# Altium PCB PCB2.PcbDoc
Units mil, origin at the board's own origin, x right, y up, seen from the top; angles counter-clockwise.
Board outline 4235.03 x 3180.03 mil, 2 copper layers (Top Layer, Bottom Layer); 12 components, 17 nets, 64 pads, 0 vias.
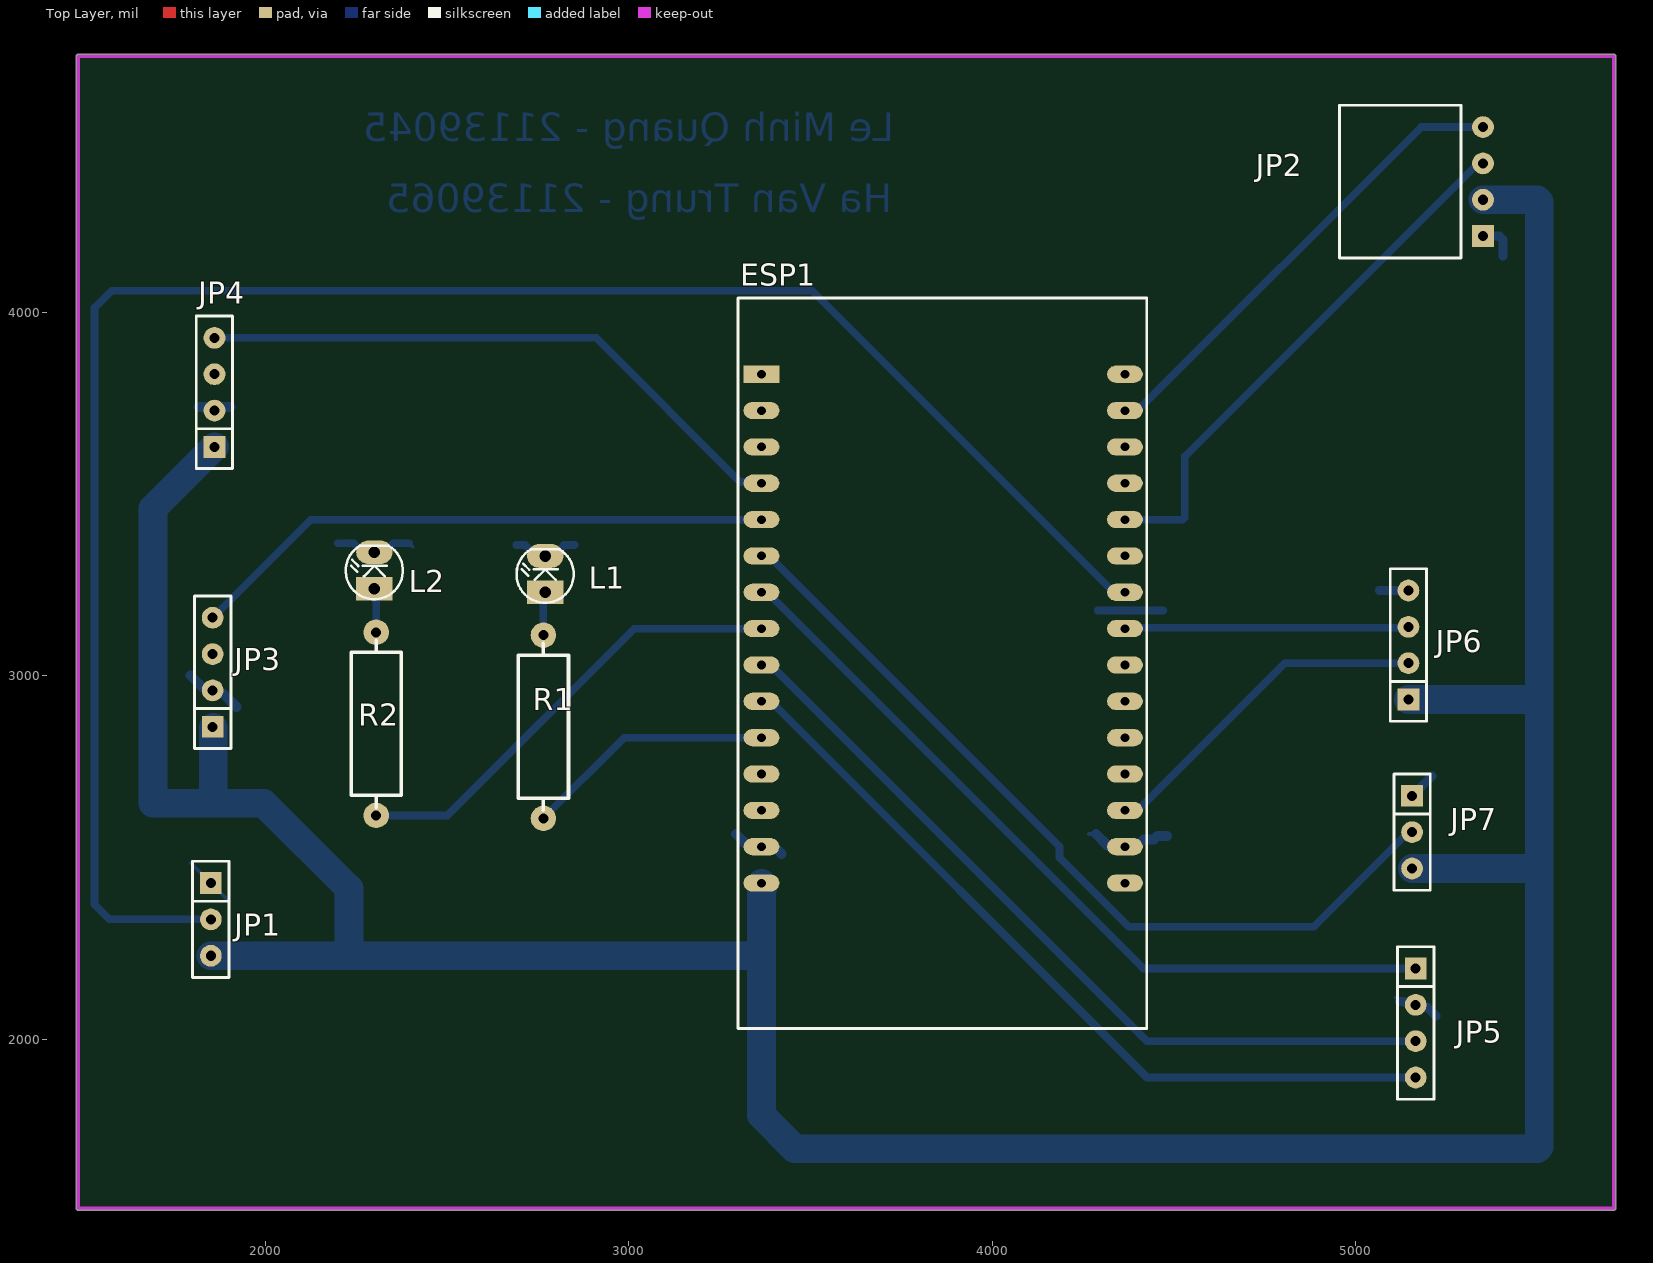
[diagram p0: Top Layer view]
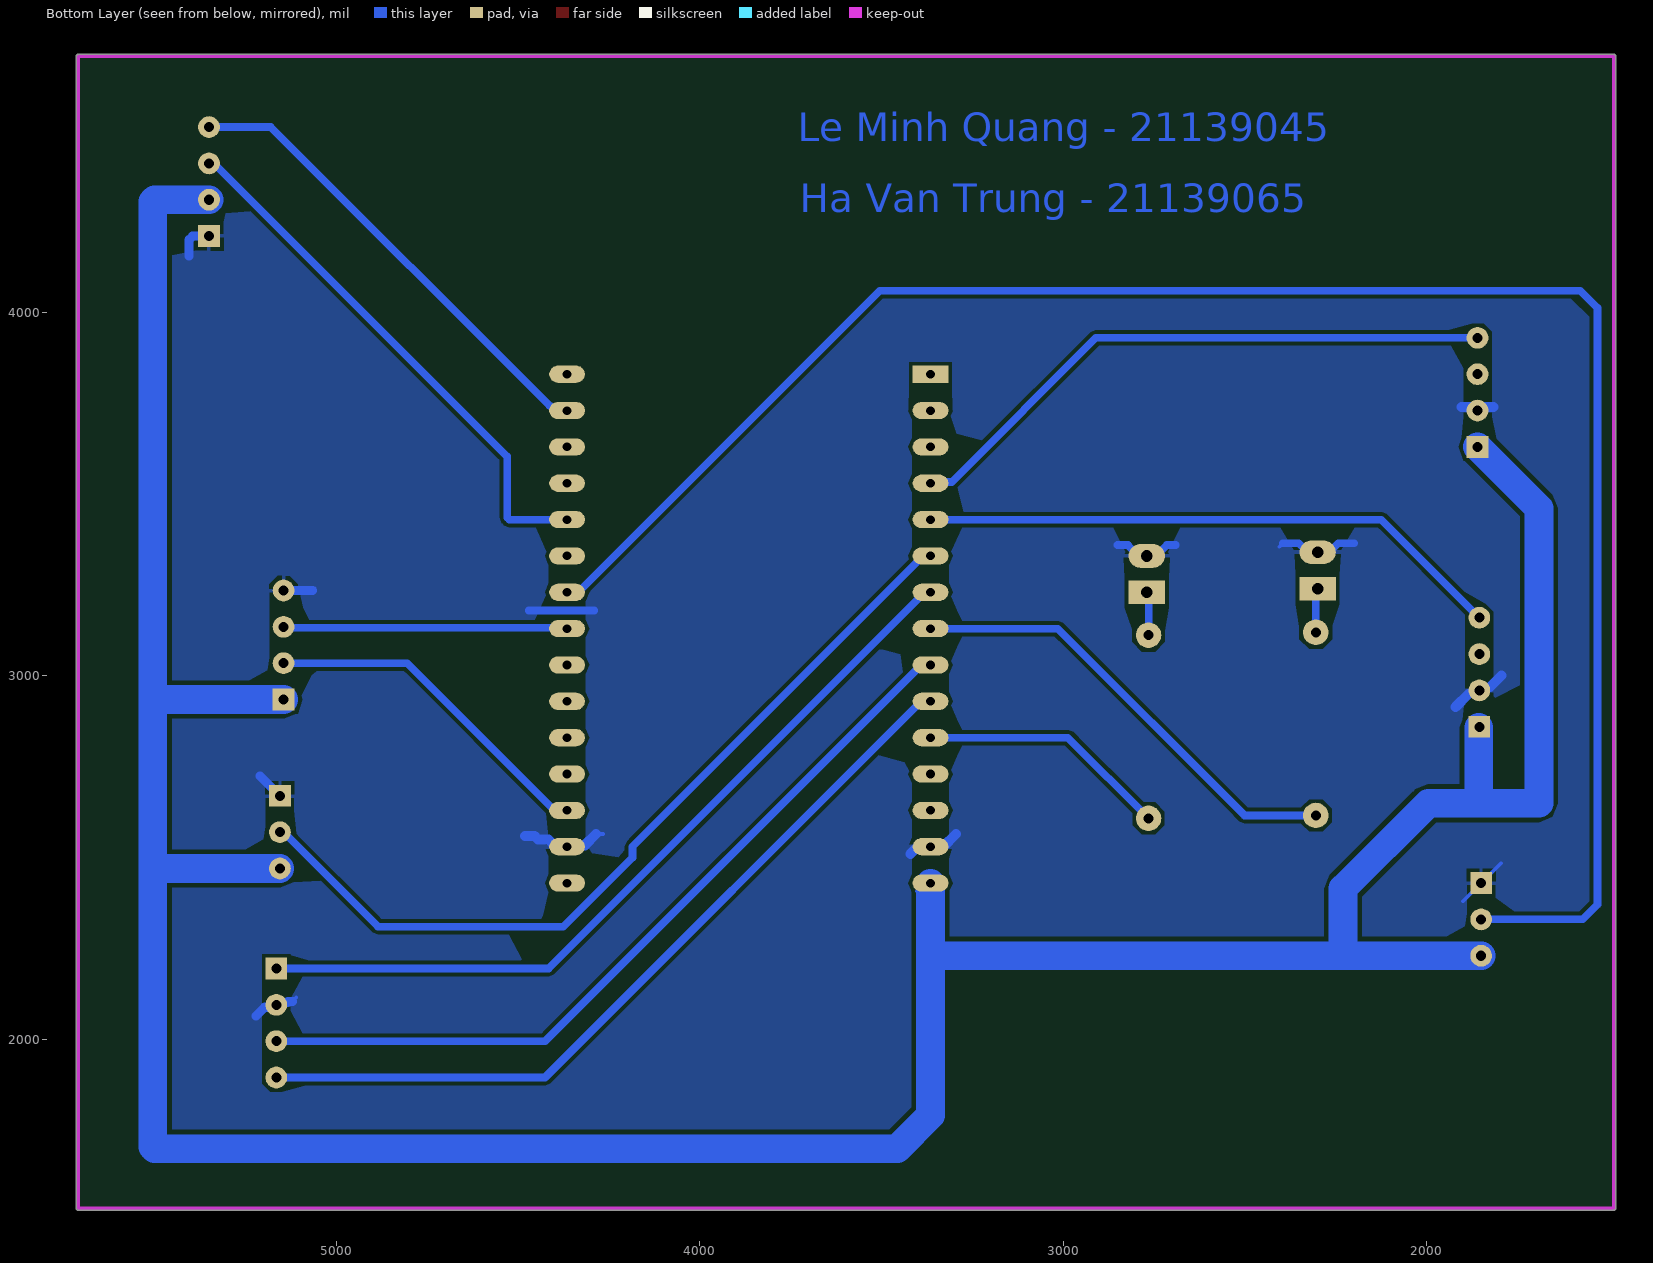
[diagram p1: Bottom Layer view, seen from below]
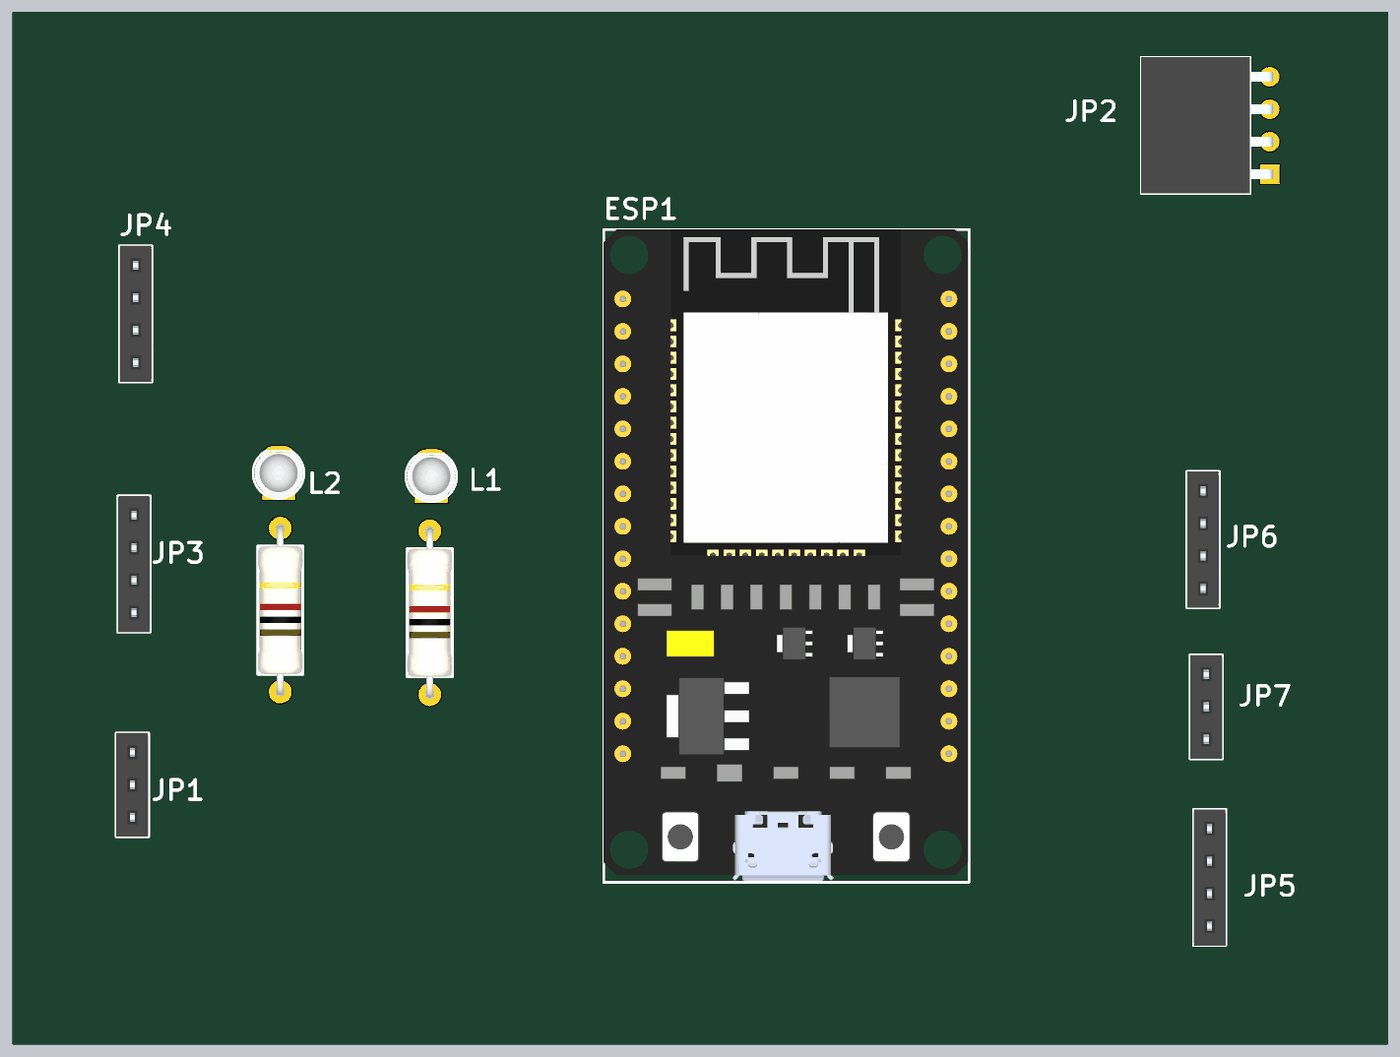
[diagram p2: 3D render of the assembled board from above, using the file's embedded part models]

## Layer stack, top to bottom
Top Solder: solder mask 0.4, Solder Resist, Dk 3.5
Top Layer: signal copper 1.4
Dielectric 1: dielectric 12.6, FR-4, Dk 4.8
Bottom Layer: signal copper 1.4
Bottom Solder: solder mask 0.4, Solder Resist, Dk 3.5

## Board outline
1479.99,1535 1479.98,4705 cw(c1485,4705) 1485,4710.02 5710,4710.02 cw(c5710,4705) 5715.02,4705 5715.02,1535 cw(c5710,1535) 5710,1529.98 1485,1529.98 cw(c1485,1535)

## Design rules (kind name [scope] priority, off if disabled: settings)
Clearance [All] p1: gap=10 ignorepadtopadclearanceinfootprint=FALSE
PolygonConnect [All] p1: connectstyle=Relief reliefconductorwidth=10 reliefentries=4 polygonreliefangle="90 Angle" airgapwidth=10
RoutingVias [All] p1: holewidth=28 width=50 viastyle="Through Hole" minholewidth=28 minwidth=50 maxholewidth=28 maxwidth=50
SolderMaskExpansion [All] p1: expansion=4 istentingtop=FALSE
Width [All] p1: maxlimit=10 minlimit=10 preferedwidth=10
30 further rules are at their usual default settings.

## Classes and differential pairs
component class Sheet2: ESP1 JP1 JP2 JP4 JP7 L1 L2 R1 R2

## Components (designator, comment, footprint, x,y, rotation, side; value= is the part's Value field where it differs from the comment)
ESP1 "ESP32 DEVKIT" "ESP32 WROOM 32 KIT" 3365,3830 r0 top
JP1 "dht11" "JP 1x3 CT" 1850,2430 r270 top
JP2 "LCD" "JP 1x4 CC" 5350,4360 r90 top
JP3 "dat" "JP 1x4 CT" 1855,2860 r90 top
JP4 "anhsang" "JP 1x4 CT" 1860,3630 r90 top
JP5 "L298n" "JP 1x4 CT" 5165,2195 r270 top
JP6 "Ultrasonic" "JP 1x4 CT" 5145,2935 r90 top
JP7 "" "JP 1x3 CT" 5155,2670 r270 top
L1 "LED 3mm" LED-3MM-WHITE 2770,3230 r90 top
L2 "LED 3mm" LED-3MM-WHITE 2300,3240 r90 top
R1 "330R" "tro vach 1/2w" 2765,2860 r90 top
R2 "330R" "tro vach 1/2w" 2305,2868.03 r90 top

## Footprints (in the part's own frame and the unit in brackets; to place one, negate y for a bottom-side part, rotate by r counter-clockwise, add the part's x,y. Pads: shape width x height; smd on the part's side, far side on the other; paste and mask are expansions set on the pad)
"ESP32 WROOM 32 KIT" [mm]
  rect 2.5x1.2 hole 0.6: 1(0,0)
  oval 2.5x1.2 hole 0.6: 2(0,-2.54) 3(0,-5.08) 4(0,-7.62) 5(0,-10.16) 6(0,-12.7) 7(0,-15.24) 8(0,-17.78) 9(0,-20.32) 10(0,-22.86) 11(0,-25.4) 12(0,-27.94) 13(0,-30.48) 14(0,-33.02) 15(0,-35.56) 16(25.4,-35.56) 17(25.4,-33.02) 18(25.4,-30.48) 19(25.4,-27.94) 20(25.4,-25.4) 21(25.4,-22.86) 22(25.4,-20.32) 23(25.4,-17.78) 24(25.4,-15.24) 25(25.4,-12.7) 26(25.4,-10.16) 27(25.4,-7.62) 28(25.4,-5.08) 29(25.4,-2.54) 30(25.4,0)
  silkscreen extent -1.65,-45.72 26.92,5.33, body extent -1.65,-45.6 26.85,5.33, height 10.49
"JP 1x3 CT" [mm]
  rect 1.52x1.52 hole 0.7: 1(0,0)
  round 1.52 hole 0.7: 2(2.54,0) 3(5.08,0)
  silkscreen extent -1.52,-1.27 6.6,1.27, body extent -1.52,-1.25 6.6,1.25, height 8.51
"JP 1x4 CC" [mm]
  rect 1.52x1.52 hole 0.7: 1(-3.81,0)
  round 1.52 hole 0.7: 2(-1.27,0) 3(1.27,0) 4(3.81,0)
  silkscreen extent -5.33,1.52 5.33,10.03, body extent -5.33,-0.25 5.33,10.05, height 2.51
"JP 1x4 CT" [mm]
  rect 1.52x1.52 hole 0.7: 1(0,0)
  round 1.52 hole 0.7: 2(2.54,0) 3(5.08,0) 4(7.62,0)
  silkscreen extent -1.52,-1.27 9.14,1.27, body extent -1.52,-1.25 9.14,1.25, height 8.51
LED-3MM-WHITE [mil] "LED 2 PIN, 3ly Only colour"
  rect 65x100 hole 32: 1(0,0)
  oval 65x100 hole 32: 2(100,0)
  silkscreen extent -29,-78 118,79, body extent -25,-75 113,75, height 217
"tro vach 1/2w" [mil]
  round 70 hole 27.56: 1(-251.97,0) 2(251.97,0)
  silkscreen extent -230,-69 230,69, body extent -261,-69 261,69, height 138

## Part data
ESP1: library part "ESP32 WROOM 32 KIT"
JP1 JP7: library part "JP 1x3 2.54 Cai Thang", "Cắm", Chung_Loai=Cắm, Don_Vi=Con, Ma_Hang=MH004006, Ten_Linh_Kien="Jump Đơn Cái 2.54MM 1x20P Thẳng"
JP2: library part "JP 1x4 2.54 Cai Cong", "Cắm", Chung_Loai=Cắm, Don_Vi=Con, Ma_Hang=MH001265, Ten_Linh_Kien="Jump Đơn Cái 2.54MM 1x40P Cong"
JP3 JP4 JP5 JP6: library part "JP 1x4 2.54 Cai Thang", "Cắm", Chung_Loai=Cắm, Don_Vi=Con, Ma_Hang=MH004006, Ten_Linh_Kien="Jump Đơn Cái 2.54MM 1x20P Thẳng"
L1 L2: library part "LED 3mm Trang", "Cắm", Chung_Loai=Cắm, Don_Vi=Con, Ma_Hang=MH009001, Ten_Linh_Kien="LED 3MM Trắng SS (1000c)"
R1 R2: library part "Tro Vach 1/2W 5% 330R", "Cắm", Chung_Loai=Cắm, Don_Vi=Con, Ma_Hang=MH006204, So_Chan=2, Ten_Linh_Kien="Trở 5% 1/2w 330R"

## Nets (pads, with @x,y where several pads share a name; then routed paths per layer and width w, separated by ;. In a path a pad name is that pad's centre, name@x,y a point inside that pad or via, vN(x,y) a via of type N, cw(c..) or ccw(c..) an arc to the next point about the centre after c; other vN are vias at no path point)
D5: ESP1.23 JP6.3 | length 790.6
  Bottom Layer w10: ESP1.23@4367.5,3132.5 ESP1.23 ESP1.23@4371.01,3123.99 ; JP6.3@5142.5,3132.5 JP6.3
  Bottom Layer w21: ESP1.23@4367.5,3132.5 JP6.3@5142.5,3132.5
D14: ESP1.11 R1.1 | length 691.9
  Bottom Layer w21: R1.1 2986.97,2830 ESP1.11
D15: ESP1.18 JP6.2 | length 947.8
  Bottom Layer w10: ESP1.18 ESP1.18@4400,2630
  Bottom Layer w21: ESP1.18@4400,2630 4805,3035 JP6.2
D18: ESP1.24 JP1.2 | length 5177.2
  Bottom Layer w10: ESP1.24@4325,3240 4335,3230 ESP1.24
  Bottom Layer w21: JP1.2 1570.86,2330 1530,2370.86 1530,4012.7 1577.3,4060 3505,4060 ESP1.24@4325,3240
D21: ESP1.26 JP2.3 | length 1489.1
  Bottom Layer w10: 4524.14,3430 4530,3435.86 ; JP2.3@5336.51,4410 JP2.3
  Bottom Layer w21: ESP1.26 4524.14,3430 ; 4530,3435.86 4530,3603.49 JP2.3@5336.51,4410
D22: ESP1.29 JP2.4 | length 1308.1
  Bottom Layer w21: ESP1.29 4397.69,3730 4410.81,3743.12 4413.12,3743.12 5180,4510 JP2.4
D25: ESP1.8 R2.1 | length 1272.9
  Bottom Layer w21: R2.1 2501.06,2616.06 3015,3130 ESP1.8
D26: ESP1.9 JP5.3 | length 2228.7
  Bottom Layer w10: ESP1.9 ESP1.9@3390.59,3030
  Bottom Layer w21: ESP1.9@3390.59,3030 4425.59,1995 JP5.3
D27: ESP1.10 JP5.4 | length 2228.7
  Bottom Layer w10: ESP1.10 ESP1.10@3390.59,2930
  Bottom Layer w21: ESP1.10@3390.59,2930 4425.59,1895 JP5.4
D32: ESP1.6 JP7.2 | length 2337.8
  Bottom Layer w10: ESP1.6 ESP1.6@3385,3330 ; JP7.2@5145,2570 JP7.2
  Bottom Layer w21: ESP1.6@3385,3330 4185,2530 4185,2500 4375,2310 4885,2310 JP7.2@5145,2570
D33: ESP1.7 JP5.1 | length 2228.7
  Bottom Layer w10: ESP1.7 ESP1.7@3380.51,3230
  Bottom Layer w21: ESP1.7@3380.51,3230 4415.51,2195 JP5.1
D34: ESP1.4 JP4.4 | length 1670.7
  Bottom Layer w10: JP4.4 JP4.4@1873.49,3930
  Bottom Layer w21: JP4.4@1873.49,3930 2910,3930 3306.73,3533.27 3361.73,3533.27 ESP1.4
D35: ESP1.5 JP3.4 | length 1621.8
  Bottom Layer w21: JP3.4 2125,3430 ESP1.5
GND: ESP1.14 ESP1.17 JP1.1 JP2.1 JP3.2 JP4.2 JP5.2 JP6.4 JP7.1 L1.2 L2.2 | length 1779.8
  Bottom Layer w10: 1795,2485 JP1.1 1900,2380 ; 1825.46,2969.54 1845.46,2969.54 JP3.2 ; JP4.2@1850.46,3739.54 JP4.2 JP4.2@1869.54,3739.54 ; JP3.2@1864.54,2950.46 1884.54,2950.46 ; L2.2@2267.62,3340 L2.2 L2.2@2317.5,3340 ; 2395,3365 2405,3355 ; L1.2@2745.32,3330 L1.2 L1.2@2787.5,3330 ; ESP1.14@3330,2530 ESP1.14 ESP1.14@3400.67,2530 ; 4265.59,2565 4285,2565 ; ESP1.17 ESP1.17@4395.21,2530 ; 5060,3240.86 5065.86,3235 ; 5110,2115 5120.46,2104.54
  Bottom Layer w21: 2200,3365 2242.62,3365 L2.2@2267.62,3340 ; L2.2@2317.5,3340 2326.8,3340 2351.8,3365 2395,3365 ; 2690,3360 2715.32,3360 L1.2@2745.32,3330 ; L1.2@2787.5,3330 2791.8,3330 2821.8,3360 2850.36,3360 ; 4290,3180 4470,3180
  Bottom Layer w25: 5065.86,3235 JP6.4 ; 5120.46,2104.54 5132.93,2104.54 5135.8,2101.67 5158.33,2101.67 5171.67,2088.33 5196.67,2088.33 5221.22,2063.78 ; JP7.1 5210,2725 ; JP2.1 5395,4210 5405,4200 5405,4155
  Bottom Layer w27.56: 1794.3,3000.7 1825.46,2969.54 ; 1815.46,3739.54 JP4.2@1850.46,3739.54 ; JP4.2@1869.54,3739.54 1904.54,3739.54 ; 1884.54,2950.46 1920,2915 ; 3295,2565 ESP1.14@3330,2530 ; ESP1.14@3400.67,2530 3420.67,2510 ; 4285,2565 4316.23,2533.77 4361.23,2533.77 ESP1.17 ; ESP1.17@4395.21,2530 4395.92,2530 4415.92,2550 4445,2550 4455,2560 4480,2560
NetL1_1: L1.1 R1.2 | length 120.1
  Bottom Layer w10: L1.1@2765,3225 L1.1
  Bottom Layer w21: R1.2 L1.1@2765,3225
NetL2_1: L2.1 R2.2 | length 127.1
  Bottom Layer w10: L2.1@2295,3240 L2.1 L2.1@2305,3235
  Bottom Layer w21: R2.2 L2.1@2305,3235
VIN: ESP1.15 JP1.3 JP2.2 JP3.1 JP4.1 JP6.1 JP7.3 | length 9924.8
  Bottom Layer w10: JP3.1@1850,2855 JP3.1 ; 1995,2650 2001.87,2643.13 ; 3345,2230 3365,2210 ; ESP1.15@3380.51,2430 3402.61,2407.91 3402.61,2407.39 ; 5499.14,1699.14 5505,1705 ; 5500,2470 5505,2465
  Bottom Layer w78.74: JP1.3 2230,2230 ; JP3.1@1856.87,2858.13 1856.87,2650 ; JP4.1 1690.86,3460.86 1690.86,2650 1856.87,2650 ; 1995,2650 1856.87,2650 ; 2001.87,2643.13 2230,2415 2230,2230 ; 3345,2230 2230,2230 ; ESP1.15 3365,2210 3365,1791.12 3456.98,1699.14 5499.14,1699.14 ; JP6.1 5505,2935 ; JP7.3 5500,2470 ; JP2.2 5499.14,4310 5505,4304.14 5505,2935 ; 5505,1705 5505,2465 ; 5505,2470 5505,2935
pads on no net: ESP1.1 ESP1.2 ESP1.3 ESP1.12 ESP1.13 ESP1.16 ESP1.19 ESP1.20 ESP1.21 ESP1.22 ESP1.25 ESP1.27 ESP1.28 ESP1.30 JP3.3 JP4.3

## Polygon pours and split planes (outlines as drawn)
GND on Bottom Layer "GND_L02_P000" (solid, remove dead copper, pour order 0): 1485,4705 5710,4705 5710,1535 1485,1535

## Keep-outs
Keep-Out Layer:
  lines w10: 1485,1535 2956.25,1535 4238.75,1535 5710,1535 5710,4705 5580,4705 1485,4705 1485,1535

## Other copper
Bottom Layer:
  text "Le Minh Quang - 21139045" at 3730,4471.24 h78.74
  text "Ha Van Trung - 21139065" at 3725,4276.24 h78.74